# Altium PCB LazeEyeMini.PcbDoc
Units mm, origin at the board's own origin, x right, y up, seen from the top; angles counter-clockwise.
Board outline 18 x 18 mm, 2 copper layers (Top Layer, Bottom Layer); 16 components, 30 nets, 74 pads, 30 vias.
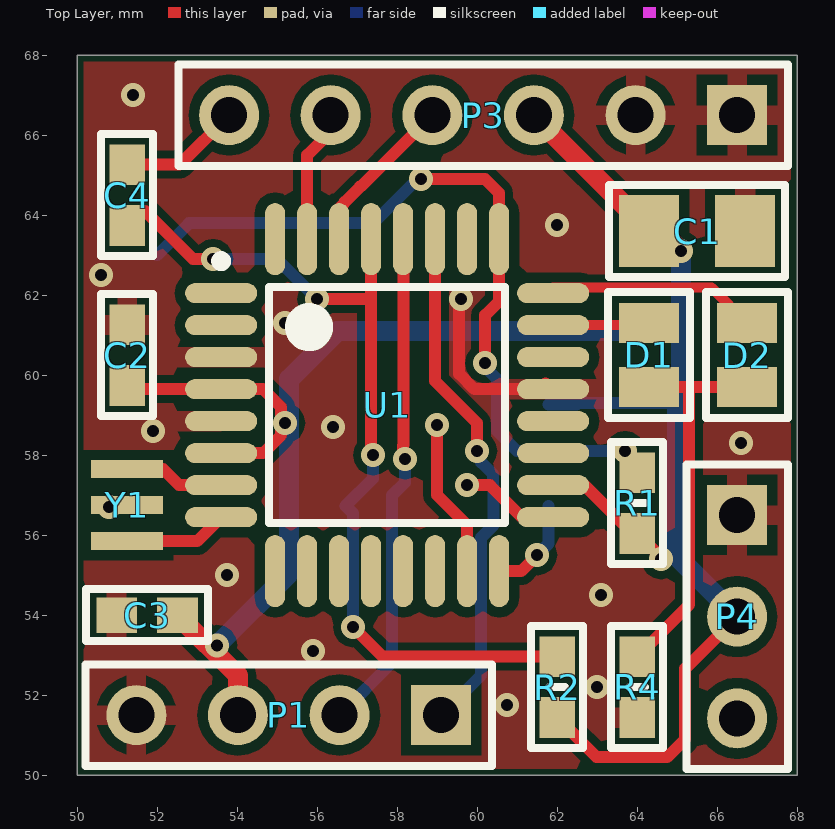
[diagram p0: Top Layer view]
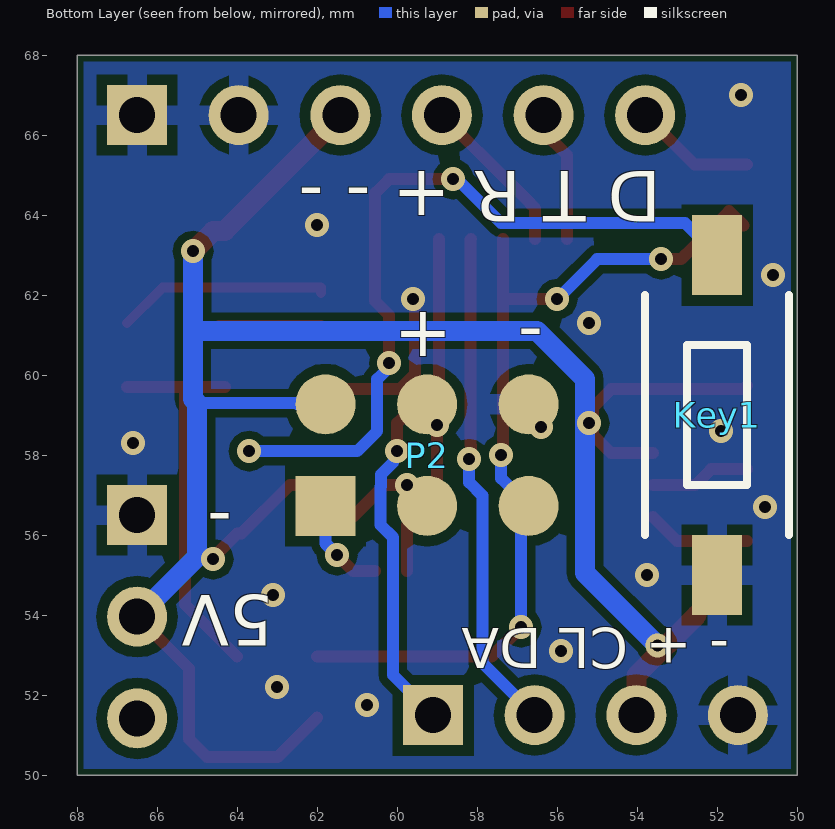
[diagram p1: Bottom Layer view, seen from below]

## Layer stack, top to bottom
Top Solder: solder mask 0.0102, Solder Resist, Dk 3.5
Top Layer: signal copper 0.0356
Dielectric 1: dielectric 0.32, FR-4, Dk 4.8
Bottom Layer: signal copper 0.0356
Bottom Solder: solder mask 0.0102, Solder Resist, Dk 3.5

## Board outline
50,50 68,50 68,68 50,68

## Design rules (kind name [scope] priority, off if disabled: settings)
BoardOutlineClearance BoardOutlineClearance_1 [OnLayer('Top Overlay')] p1: gap=0
BoardOutlineClearance [All] p2: gap=0.3 except(0.15: Poly-OutlineEdge)
Clearance [All] p1: gap=0.2 except(0.26: Arc-SMDPad Arc-THPad Arc-Fill Track-SMDPad Track-THPad Track-Fill SMDPad-SMDPad SMDPad-THPad SMDPad-Via SMDPad-Fill SMDPad-Poly SMDPad-Region SMDPad-Text THPad-THPad THPad-Via THPad-Fill THPad-Poly THPad-Region THPad-Text Via-Fill Fill-Fill)
ComponentClearance [All] p1: gap=0.25 collisioncheckmode=3 verticalgap=0 showdistances=FALSE
HoleSize [All] p1: absolutevalues=TRUE maxlimit=6 minlimit=0.3 maxpercent=80.000 minpercent=20.000
HoleToHoleClearance [All] p1: gap=0.2 allowstackedmicrovias=TRUE
MinimumSolderMaskSliver [All] p1: minsoldermaskwidth=0
PolygonConnect PolygonConnect_1 [isVia vs InNet('Gnd')] p1: connectstyle=Direct reliefconductorwidth=0.254 reliefentries=4 polygonreliefangle="90 Angle" airgapwidth=0.254
PolygonConnect [All] p2: connectstyle=Relief reliefconductorwidth=0.5 reliefentries=4 polygonreliefangle="90 Angle" airgapwidth=0.254
RoomDefinition LazeEye-mini [InComponentClass('LazeEye-mini')] p1: confinementstyle=ConfineOut formatcopy=TRUE lockcomponents=FALSE outline 128.016,22.86 266.827,22.86 266.827,99.441 128.016,99.441
RoutingVias [All] p1: holewidth=0.3 width=0.6 viastyle="Through Hole" minholewidth=0.3 minwidth=0.6 maxholewidth=3 maxwidth=3
SilkToSilkClearance [All] p1: silktosilkclearance=0
SilkToSolderMaskClearance [IsPad] p1: minsilkscreentomaskgap=0 clearancetoexposedcopper=TRUE
SolderMaskExpansion [All] p1: expansion=0.102
Width [All] p1: maxlimit=3 minlimit=0.2 preferedwidth=0.35
24 further rules are at their usual default settings.

## Components (designator, comment, footprint, x,y, rotation, side; value= is the part's Value field where it differs from the comment)
C1 "10uf" 1206 65.5,63.6 r180 top
C2 "104" "0603 CAP" 51.25,60.5 r270 top
C3 "104" "0603 CAP" 51.75,54 r0 top
C4 "104" "0603 CAP" 51.25,64.5 r270 top
D1 "LED" "0805 LED" 64.3,60.5 r90 top
D2 "LED" "0805 LED" 66.75,60.5 r90 top
Key1 "Key666" "KEY SMT 2FOOT" 52,59 r270 bottom locked
P1 "I2C" HDR1X4 59.1,51.5 r180 top
P2 "ISP" ISP_PAD 59.25,58 r90 bottom locked
P3 "FTDI" HDR1X6 66.5,66.5 r180 top
P4 "Power" HDR1X3 66.5,56.5 r270 top
R1 "10k" "0603 RES" 64,56.8 r270 top
R2 "10k" "0603 RES" 62,52.2 r270 top
R4 "10k" "0603 RES" 64,52.2 r90 top
U1 "ATmega328" ATMEGA328FIX 57.75,59.25 r0 top locked
Y1 "Crystal3Foot" Crystal3Foot 51.25,56.75 r270 top

## Footprints (in the part's own frame and the unit in brackets; to place one, negate y for a bottom-side part, rotate by r counter-clockwise, add the part's x,y. Pads: shape width x height; smd on the part's side, far side on the other; paste and mask are expansions set on the pad)
"0603 CAP" [mil]
  rect 40x35 smd: 1(-29.92,0) 2(29.92,0)
  silkscreen extent -60,-26 60,26, body extent -31,-16 31,16, height 24
"0603 RES" [mil]
  rect 40x35 smd: 1(-29.92,0) 2(29.92,0)
  silkscreen extent -60,-26 60,26, body extent -31,-16 31,16, height 20
"0805 LED" [mm]
  rect 1x1.5 smd: 1(0.8,0) 2(-0.8,0)
  silkscreen extent -1.58,-1.02 1.58,1.02, body extent -1,-0.55 1,0.55, height 0.5
1206 [mm]
  rect 1.5x1.8 smd: 1(-1.2,0) 2(1.2,0)
  silkscreen extent -2.2,-1.15 2.2,1.15, body extent -1.7,-0.9 1.7,0.9, height 1.5
ATMEGA328FIX [mm] "QFP, 32-Leads, Body 9.0x9.0mm (max), Pitch 0.80mm, IPC Medium Density"
  oval 1.8x0.5 smd: 1(-4.15,2.8) 2(-4.15,2) 3(-4.15,1.2) 4(-4.15,0.4) 5(-4.15,-0.4) 6(-4.15,-1.2) 7(-4.15,-2) 8(-4.15,-2.8) 17(4.15,-2.8) 18(4.15,-2) 19(4.15,-1.2) 20(4.15,-0.4) 21(4.15,0.4) 22(4.15,1.2) 23(4.15,2) 24(4.15,2.8)
  oval 0.5x1.8 smd: 9(-2.8,-4.15) 10(-2,-4.15) 11(-1.2,-4.15) 12(-0.4,-4.15) 13(0.4,-4.15) 14(1.2,-4.15) 15(2,-4.15) 16(2.8,-4.15) 25(2.8,4.15) 26(2,4.15) 27(1.2,4.15) 28(0.4,4.15) 29(-0.4,4.15) 30(-1.2,4.15) 31(-2,4.15) 32(-2.8,4.15)
  silkscreen extent -4.27,-2.95 2.95,3.72, body extent -3.5,-3.5 3.5,3.5, height 2
Crystal3Foot [mm]
  rect 0.45x1.8 smd: 1(-0.9,0) 2(0,0) 3(0.9,0)
  body extent -1.5,-0.8 1.5,0.8, height 0.5
HDR1X3 [mm] "Connector; Header; 3 Position"
  rect 1.5x1.5 hole 0.9: 1(0,0)
  round 1.5 hole 0.9: 2(2.54,0) 3(5.08,0)
  silkscreen extent -1.27,-1.27 6.35,1.27
HDR1X4 [mm] "Connector; Header; 4 Position"
  rect 1.5x1.5 hole 0.9: 1(0,0)
  round 1.5 hole 0.9: 2(2.54,0) 3(5.08,0) 4(7.62,0)
  silkscreen extent -1.27,-1.27 8.89,1.27
HDR1X6 [mm] "Connector; Header; 6 Position"
  rect 1.5x1.5 hole 0.9: 1(0,0)
  round 1.5 hole 0.9: 2(2.54,0) 3(5.08,0) 4(7.62,0) 5(10.16,0) 6(12.7,0)
  silkscreen extent -1.27,-1.27 13.97,1.27
ISP_PAD [mm]
  rect 1.5x1.5 smd: 1(-1.27,2.54)
  round 1.5 smd: 2(-1.27,0) 3(-1.27,-2.54) 4(1.27,-2.54) 5(1.27,0) 6(1.27,2.54)
"KEY SMT 2FOOT" [mm]
  rect 2x1.25 smd: 1(-4,0) 2(4,0)
  silkscreen extent -3,-1.8 3,1.8

## Part data
C1 C2 C3 C4: library part CAP, "Capacitor"
D1 D2: "Typical RED, GREEN, YELLOW, AMBER GaAs LED"
P1: library part "Header 4", "Header, 4-Pin"
P3: library part "Header 6", "Header, 6-Pin"
P4: library part "Header 3", "Header, 3-Pin"
R1 R2 R4: library part Res, "Resistor"

## Via types
v1: diameter 0.6, hole 0.3, Top Layer to Bottom Layer, tented both sides, 30 vias

## Nets (pads, with @x,y where several pads share a name; then routed paths per layer and width w, separated by ;. In a path a pad name is that pad's centre, name@x,y a point inside that pad or via, vN(x,y) a via of type N, cw(c..) or ccw(c..) an arc to the next point about the centre after c; other vN are vias at no path point)
A0: D1.1 U1.23 | length 2.5
  Top Layer w0.25: U1.23 D1.1@64.45,61.25
A1: D2.1 U1.24 | length 5.4
  Top Layer w0.25: U1.24 61.9,62.185 65.865,62.185 D2.1
A2: Key1.1 R1.1 U1.25 | length 19.1
  Top Layer w0.3: v1(58.6,64.9) 60.2,64.9 60.55,64.55 U1.25 60.55,61.85 60.2,61.5 v1(60.2,60.3)
  Bottom Layer w0.3: Key1.1 52.8,63.8 57.4,63.8 v1@58.55,64.95 ; v1(60.2,60.3) 60.2,60.2 60.5,59.9 60.5,58.6 61,58.1 v1(63.7,58.1)
A3: U1.26
A4/SDA: P1.1 U1.27 | length 12.9
  Top Layer w0.3: U1.27 58.95,59.85 60,58.8 v1(60,58.1)
  Bottom Layer w0.3: P1.1 60.1,52.5 60.1,55.94 60.41,56.25 60.41,57.21 60.4,57.22 60.4,57.519 v1@60.1,57.819 ; v1(60,58.1) v1@60.1,58.2
A5/SCL: P1.2 U1.28 | length 12.6
  Top Layer w0.3: U1.28 58.162,63.388 58.162,58.255 58.15,58.243 58.15,57.95 v1(58.2,57.9)
  Bottom Layer w0.3: P1.2 57.87,52.81 57.87,56.99 58.2,57.32 v1(58.2,57.9)
A6: U1.19
A7: U1.22
AREF: U1.20
D2: U1.32
D3: U1.1
D4: U1.2
D5: U1.9
D6: U1.10
D7: U1.11
D8: U1.12
D9: U1.13
D10: U1.14
D11/MO: P2.5 U1.15 | length 4
  Top Layer w0.3: v1(59,58.75) 59,57 59.75,56.25 U1.15
D12/MI: P2.1 U1.16 | length 2.5
  Top Layer w0.3: U1.16 61.1,55.1 v1(61.5,55.5)
  Bottom Layer w0.3: v1(61.5,55.5) 61.79,55.79 P2.1
D13/CK: P2.2 U1.17 | length 2.5
  Top Layer w0.3: v1(59.75,57.25) 60.317,57.25 61.117,56.45 U1.17
DTR: C4.1 P3.6 | length 3.1
  Top Layer w0.3: C4.1 52.56,65.26 P3.6
GND: C1.1 C2.1 C3.1 Key1.2 P1.4 P2.4 P3.1 P3.2 P4.1 R4.1 U1.3 U1.5 U1.21 Y1.2 | length 4.6
  Top Layer w0.3: v1(59.6,61.9) 59.55,61.85 59.55,60.031 59.931,59.65 61.71,59.65 61.71,59.79 61.85,59.65 U1.21
  other v1: 60.75,51.75 63,52.2 55.9,53.1 63.1,54.5 53.75,55 50.8,56.7 66.6,58.3 51.9,58.6 56.4,58.7 55.2,61.3 50.6,62.5 62,63.75 51.4,67
NetD1_2: D1.2 D2.2 R4.2 | length 9.7
  Top Layer w0.3: R4.2 65.3,54.26 65.3,59.7 ; D1.2 65.3,59.7 ; D2.2 65.3,59.7
NetU1_7: U1.7 Y1.1 | length 2.5
  Top Layer w0.3: Y1.1 52.15,57.65 52.55,57.25 U1.7
NetU1_8: U1.8 Y1.3 | length 2.6
  Top Layer w0.3: Y1.3 53,55.85 U1.8
RST: C4.2 P2.3 R2.1 U1.29 | length 22.4
  Top Layer w0.3: C4.2@51.34,63.74 51.7,64.1 52.8,63 52.9,62.9 v1(53.4,62.9) ; v1(56,61.9) 57.35,61.9 ; v1(56.9,53.7) 57.64,52.96 R2.1 ; v1@57.35,58.15 57.35,61.9 ; U1.29 57.35,61.9
  Bottom Layer w0.3: v1(53.4,62.9) 55,62.9 ; 55,62.9 v1(56,61.9) ; v1(56.9,53.7) 56.9,56.54 P2.3 57.4,57.42 v1(57.4,58)
RXI: P3.4 U1.30 | length 4.1
  Top Layer w0.3: U1.30 56.55,64.17 56.69,64.31 56.69,64.323 57.077,64.71 57.09,64.71 P3.4
TXO: P3.5 U1.31 | length 3.3
  Top Layer w0.3: U1.31 55.75,65.5 56.34,66.09 P3.5
VCC: C1.2 C2.2 C3.2 P1.3 P2.6 P3.3 P4.2 R1.2 R2.2 U1.4 U1.6 U1.18 | length 56.4
  Top Layer w0.3: C2.2 51.34,59.65 U1.4 54.65,59.65 55.1,59.2 55.1,58.5 54.65,58.05 U1.6 ; U1.18 62.683,57.25 63.893,56.04 R1.2 64.6,55.44 v1(64.6,55.4) ; R2.2 62.99,50.45 64.75,50.45 65.2,50.9 65.2,52.66 P4.2
  Top Layer w0.5: C3.2 54.02,52.49 P1.3 ; P3.3 64.3,63.62 C1.2 64.6,63.6 v1(65.1,63.1)
  Bottom Layer w0.3: P2.6 62.48,59.27 62.45,59.3 65,59.3
  Bottom Layer w0.5: v1(53.495,53.245) 55.3,55.05 55.3,59.9 56.5,61.1 65.1,61.1 ; v1(65.1,63.1) 65.1,59.4 65,59.3 65,55.46 P4.2
  other v1: 55.2,58.8
pads on no net: P4.3

## Polygon pours and split planes (outlines as drawn)
GND on Top Layer "GND_L01_P000" (solid, pour order 0): 50,50 68,50 68,68 50,68
GND on Bottom Layer "GND_L02_P001" (solid, pour order 1): 50,50 68,50 68,68 50,68

## Silkscreen, mask and mechanical layers (free items; w line width, h text height)
Bottom Overlay:
  text "D T R + - -" at 53.4,65.1 h1.27 r180
  text "-   +" at 56.35,61.575 h1.27 r180
  text "-" at 64.75,56 h1.27
  text "5V" at 63.1,54.5 h1.27 r180
  text "- + CL DA" at 51.7,53.675 h1 r180
Mechanical 1:
  the board outline again, w0.2